# Altium PCB PCB1.PCBDOC
Units mm, origin at the board's own origin, x right, y up, seen from the top; angles counter-clockwise.
Board outline 180 x 160 mm, 2 copper layers (Top Layer, Bottom Layer); 118 components, 70 nets, 429 pads, 16 vias.
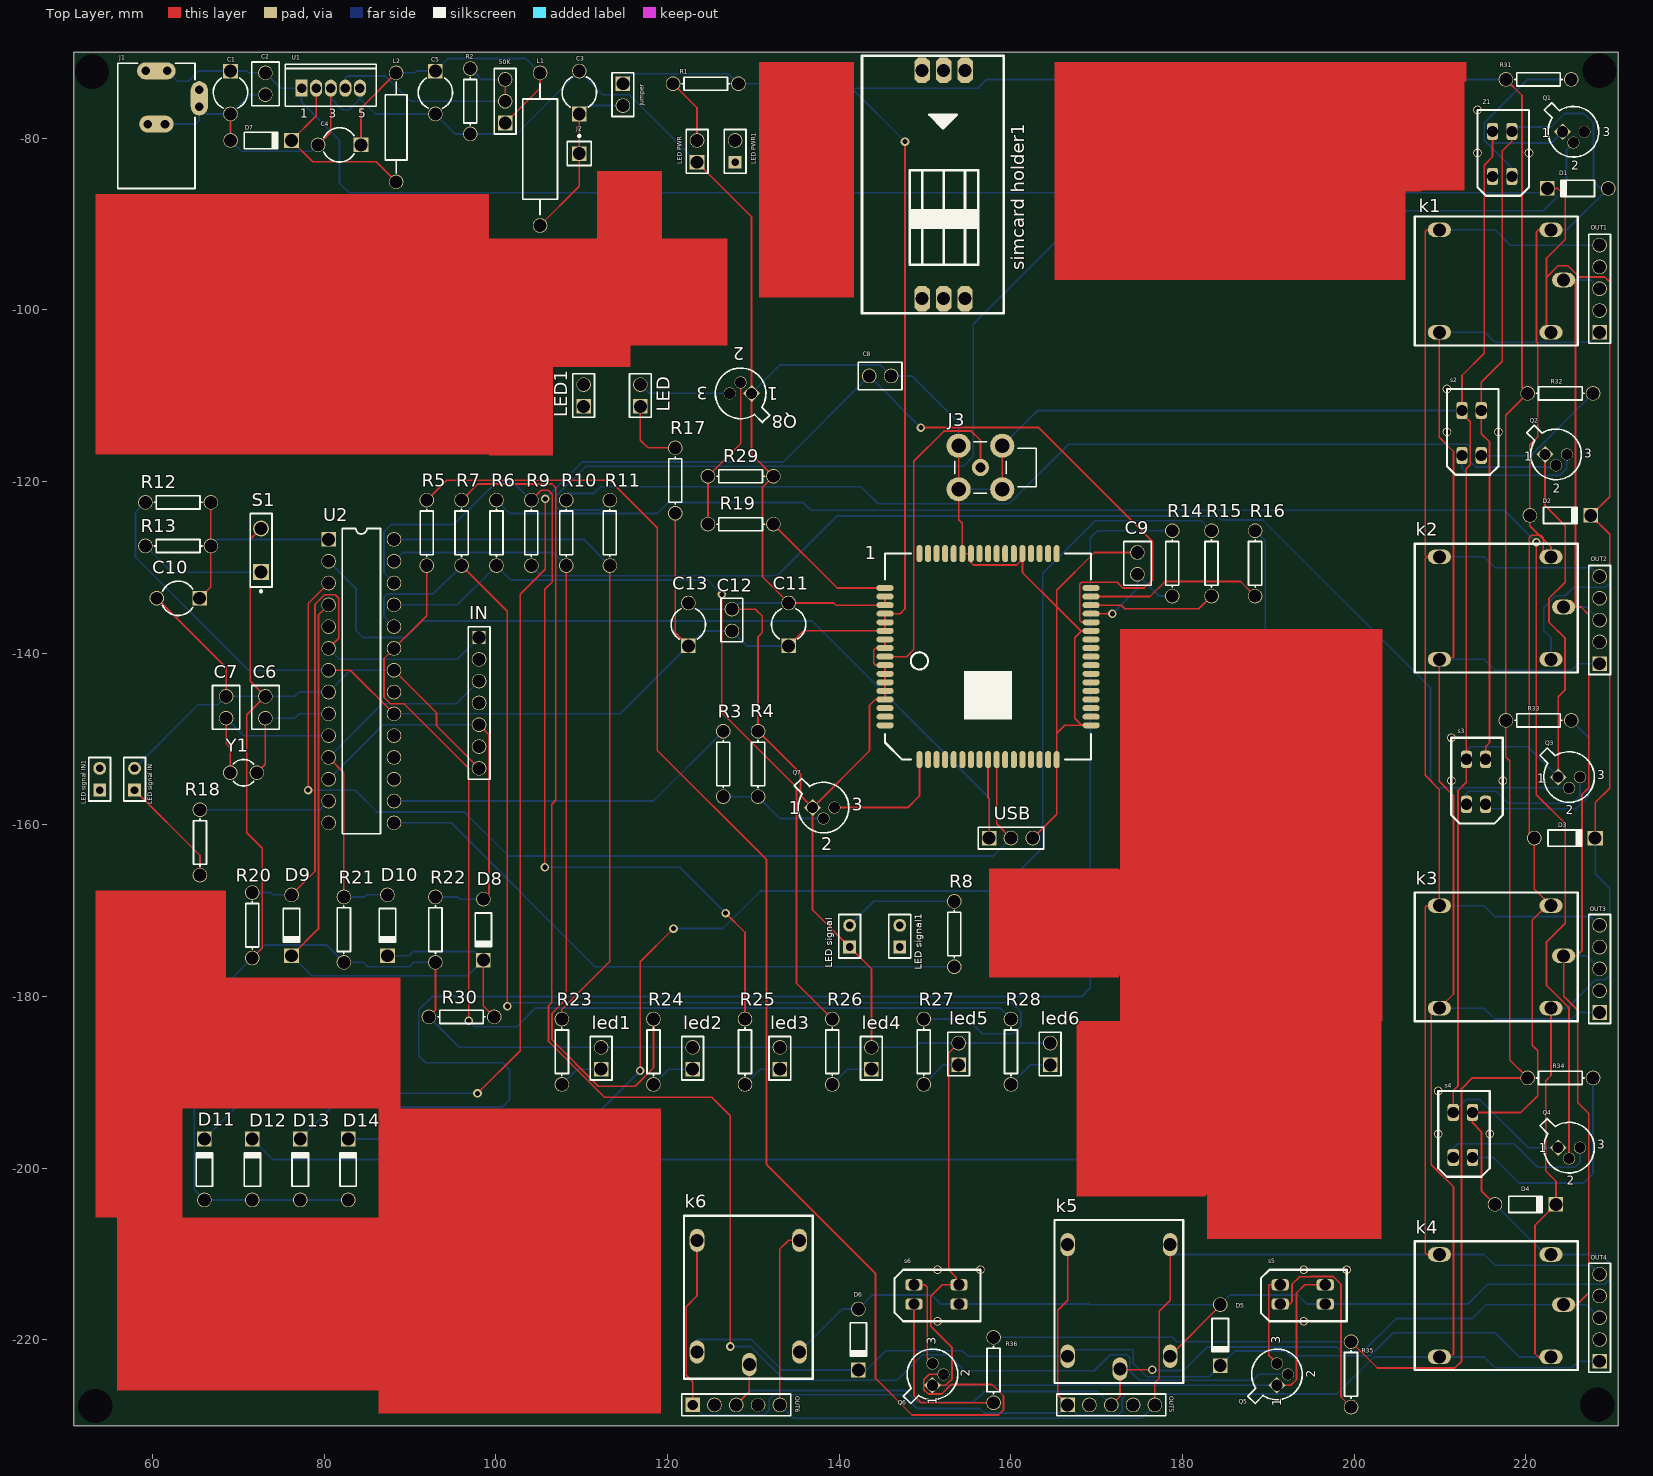
[diagram p0: Top Layer view]
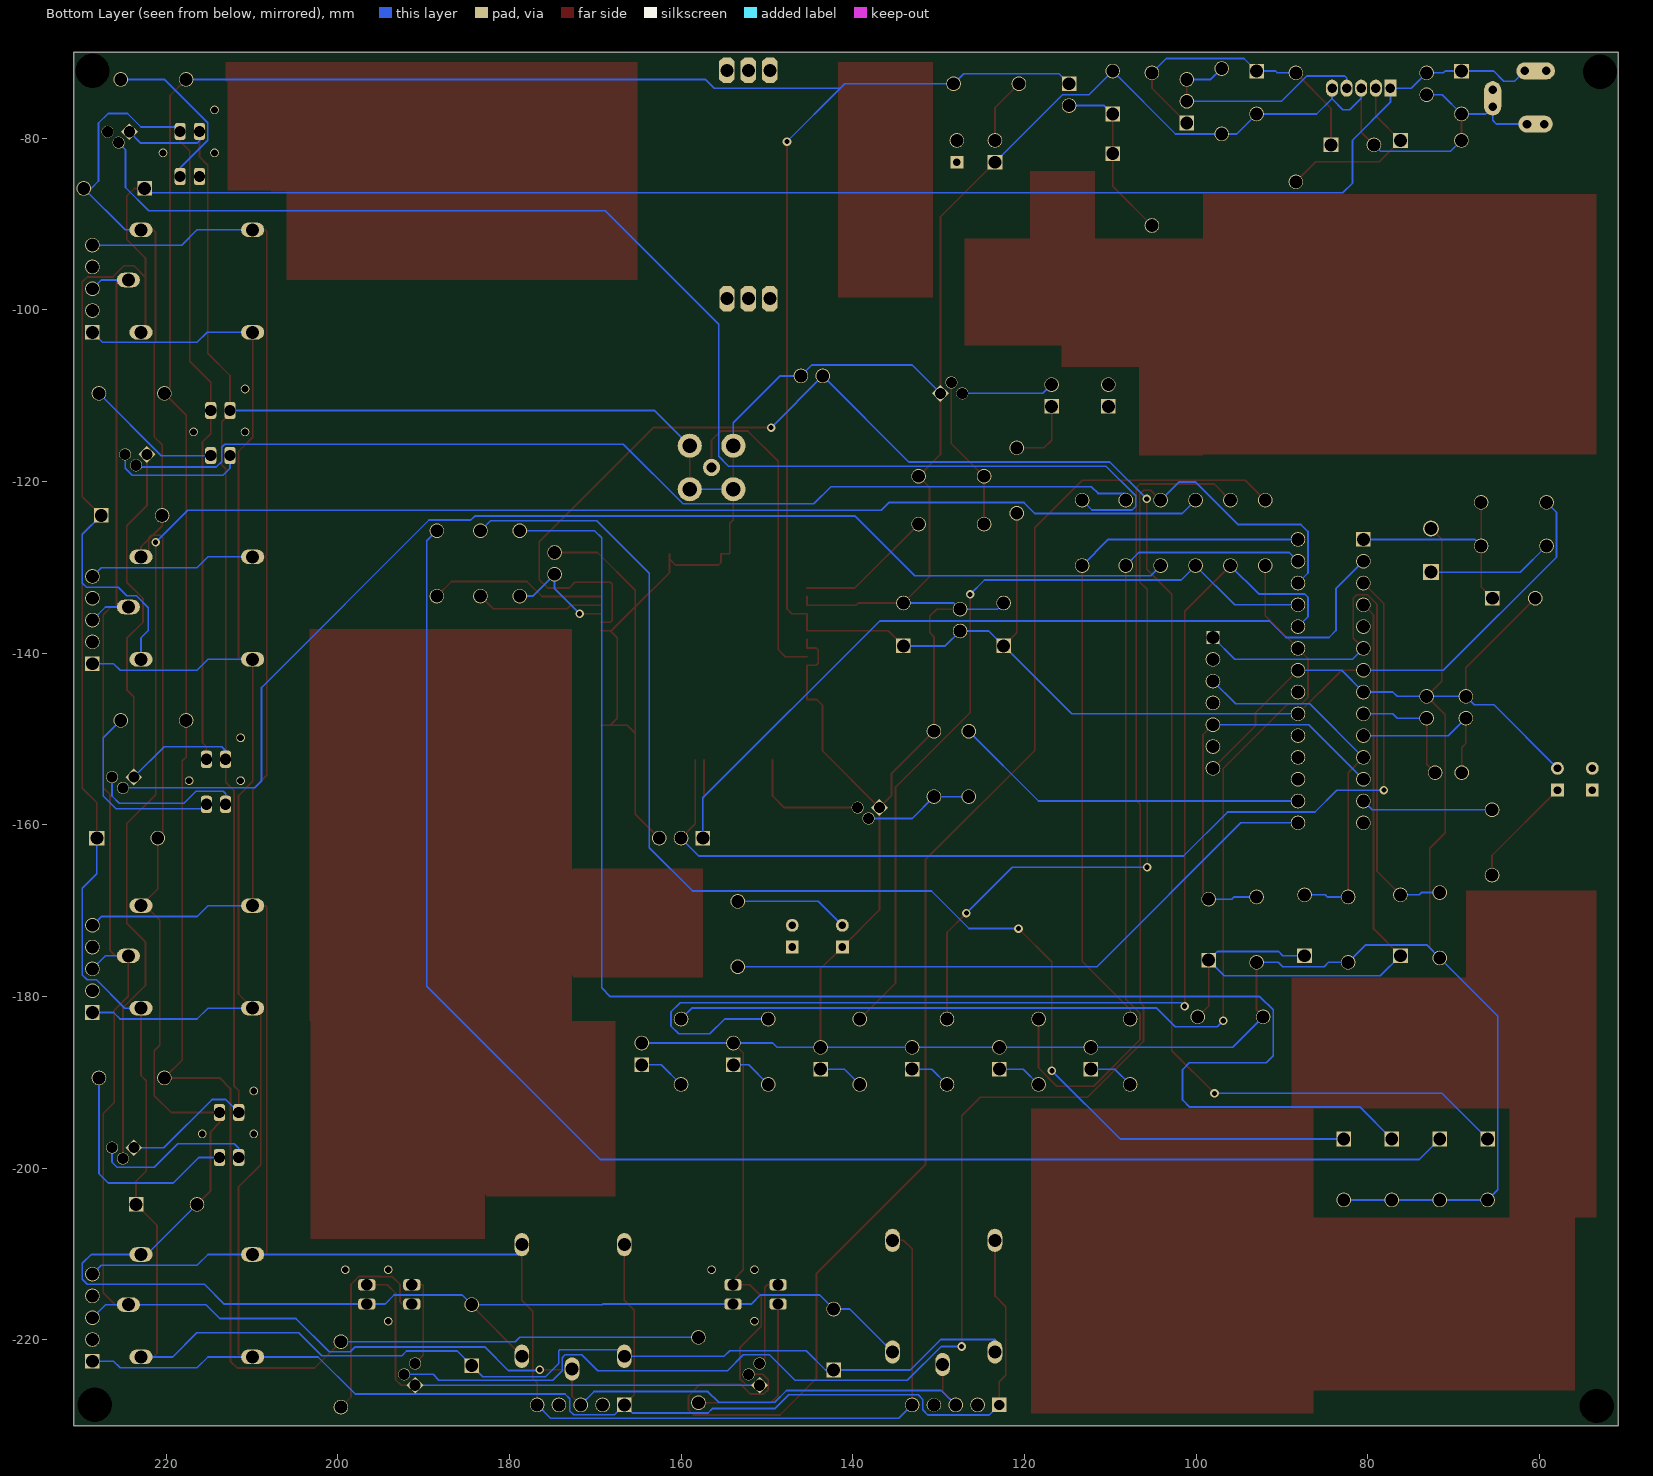
[diagram p1: Bottom Layer view, seen from below]

## Layer stack, top to bottom
Top Layer: signal copper 0.0356
Dielectric: dielectric 0.32, FR-4, Dk 4.8
Bottom Layer: signal copper 0.0356

## Board outline
50.8,-229.997 230.8,-229.997 230.8,-69.997 50.8,-69.997

## Design rules (kind name [scope] priority, off if disabled: settings)
Clearance [All] p1: gap=0.2
ComponentClearance [All] p1: gap=0.254 collisioncheckmode=3 verticalgap=0.254
PolygonConnect [All] p1: connectstyle=Relief reliefconductorwidth=0.254 reliefentries=4 polygonreliefangle="90 Angle"
RoutingVias [All] p1: holewidth=0.6 width=1 viastyle="Through Hole" minholewidth=0.711 minwidth=1.27 maxholewidth=0.711 maxwidth=1.27
SolderMaskExpansion [All] p1: expansion=0.102
TestPointUsage [All] p1: valid=0 allowmultiple=FALSE
Testpoint [All] p1: side=15 testpointundercomponent=TRUE minsize=1.016 maxsize=2.54 preferedsize=1.524 minholesize=0 maxholesize=1.016 preferedholesize=0.813 testpointgrid=0.025 style=1023 order=0123456789
Width [All] p1: maxlimit=0.2 minlimit=0.2 preferedwidth=0.2
18 further rules are at their usual default settings.

## Components (designator, comment, footprint, x,y, rotation, side; value= is the part's Value field where it differs from the comment)
1 "sim900" SIM900 149.352,-152.4 r90 top
50K "Header 3" HDR1X3 101.092,-78.232 r90 top
C1 "Cap2" CAPR5-4X5 69.088,-74.676 r270 top
C2 "Cap" VP32-3.2#1 73.152,-73.66 r90 top
C3 "Cap2" CAPR5-4X5 109.728,-74.676 r90 top
C4 "Cap2" CAPR5-4X5 81.788,-80.772 r180 top
C5 "Cap2" CAPR5-4X5 92.964,-74.676 r270 top
C6 "Cap" VP32-3.2#2 73.152,-146.304 r90 top
C7 "Cap" VP32-3.2#2 68.58,-146.304 r90 top
C8 "Cap" VP32-3.2#2 144.78,-107.696 r0 top
C9 "Cap" VP32-3.2#2 174.752,-129.54 r90 top
C10 "Cap2" CAPR5-4X5 62.992,-133.604 r180 top
C11 "Cap2" CAPR5-4X5 134.112,-136.652 r90 top
C12 "Cap" RAD-0.1 127.508,-136.144 r90 top
C13 "Cap2" CAPR5-4X5 122.428,-136.652 r90 top
D1 "Diode 1N4148" DO-35#1 226.06,-85.852 r180 top
D2 "Diode 1N4148" DO-35#1 224.028,-123.952 r0 top
D3 "Diode 1N4148" DO-35#2 224.536,-161.544 r0 top
D4 "Diode 1N4148" DO-35#1 219.964,-204.216 r0 top
D5 "Diode 1N4148" DO-35#1 184.404,-219.456 r270 top
D6 "Diode 1N4148" DO-35#1 142.24,-219.964 r270 top
D7 "Diode 1N5408" DO-35#1 72.644,-80.264 r0 top
D8 "Diode 1N4148" DO-35#1 98.552,-172.212 r270 top
D9 "Diode 1N4148" DO-35#1 76.2,-171.704 r270 top
D10 "Diode 1N4148" DO-35#1 87.376,-171.704 r270 top
D11 "D Zener4v7" DO-35#1 66.04,-200.152 r90 top
D12 "D Zener4v7" DO-35#1 71.628,-200.152 r90 top
D13 "D Zener4v7" DO-35#1 77.216,-200.152 r90 top
D14 "D Zener4v7" DO-35#1 82.804,-200.152 r90 top
IN "Header 7" HDR1X7 98.044,-138.176 r270 top
J1 "PWR2.5" KLD-0202 60.452,-85.852 r90 top
J2 "Socket" PIN1 109.728,-81.788 r0 top
J3 "COAX-F" MCX5.08-H5 156.464,-118.364 r180 top
jumper "Header 2" HDR1X2#1 114.808,-73.66 r270 top
k1 "Relay" Relays 226.06,-104.14 r90 top
k2 "Relay" Relays 226.06,-142.24 r90 top
k3 "Relay" Relays 226.06,-182.88 r90 top
k4 "Relay" Relays 226.06,-223.52 r90 top
k5 "Relay" Relays 165.1,-225.044 r0 top
k6 "Relay" Relays 121.92,-224.536 r0 top
L1 "Inductor Adj" AXIAL-0.7 105.156,-81.28 r270 top
L2 "Inductor Adj" AXIAL-0.5 88.392,-78.74 r90 top
LED "Header 2" HDR1X2#1 116.84,-111.252 r90 top
LED1 "Header 2" HDR1X2#1 110.236,-111.252 r90 top (schematic designator LED)
led1 "Header 2" HDR1X2#1 112.268,-188.468 r90 top
led2 "Header 2" HDR1X2#1 122.936,-188.468 r90 top
led3 "Header 2" HDR1X2#1 133.096,-188.468 r90 top
led4 "Header 2" HDR1X2#1 143.764,-188.468 r90 top
led5 "Header 2" HDR1X2#1 153.924,-187.96 r90 top
led6 "Header 2" HDR1X2#1 164.592,-187.96 r90 top
"LED PWR" "Header 2" HDR1X2#1 123.444,-82.804 r90 top
"LED PWR1" "Header 2" HDR1X2#2 127.889,-82.804 r90 top (schematic designator "LED PWR")
"LED signal" "Header 2" HDR1X2#3 141.224,-174.244 r90 top
"LED signal1" "Header 2" HDR1X2#3 147.066,-174.244 r90 top (schematic designator "LED signal")
"LED signal IN" "Header 2" HDR1X2#3 57.912,-155.956 r90 top
"LED signal IN1" "Header 2" HDR1X2#3 53.848,-155.956 r90 top (schematic designator "LED signal IN")
OUT1 "Header 5" HDR1X5#1 228.6,-102.616 r90 top
OUT2 "Header 5" HDR1X5#1 228.6,-141.224 r90 top
OUT3 "Header 5" HDR1X5#1 228.6,-181.864 r90 top
OUT4 "Header 5" HDR1X5#1 228.6,-222.504 r90 top
OUT5 "Header 5" HDR1X5#1 166.624,-227.584 r0 top
OUT6 "Header 5" HDR1X5#2 122.936,-227.584 r0 top
Q1 "2N2222" 22-03 225.552,-79.248 r0 top
Q2 "2N2222" 22-03 223.52,-116.84 r0 top
Q3 "2N2222" 22-03 225.044,-154.432 r0 top
Q4 "2N2222" 22-03 225.044,-197.612 r0 top
Q5 "2N2222" 22-03 191.008,-224.028 r90 top
Q6 "2N2222" 22-03 150.876,-224.028 r90 top
Q7 "2N2222" 22-03 138.176,-157.988 r0 top
Q8 "2N2222" 22-03 128.524,-109.728 r180 top
R1 "Res1" AXIAL-0.3 124.46,-73.66 r180 top
R2 "Res1" AXIAL-0.3 97.028,-75.692 r90 top
R3 "Res1" AXIAL-0.3 126.492,-152.908 r270 top
R4 "Res1" AXIAL-0.3 130.556,-152.908 r270 top
R5 "Res1" AXIAL-0.3 91.948,-125.984 r90 top
R6 "Res1" AXIAL-0.3 100.076,-125.984 r90 top
R7 "Res1" AXIAL-0.3 96.012,-125.984 r90 top
R8 "Res1" AXIAL-0.3 153.416,-172.72 r270 top
R9 "Res1" AXIAL-0.3 104.14,-125.984 r270 top
R10 "Res1" AXIAL-0.3 108.204,-125.984 r90 top
R11 "Res1" AXIAL-0.3 113.284,-125.984 r90 top
R12 "Res1" AXIAL-0.3 62.992,-122.428 r180 top
R13 "Res1" AXIAL-0.3 62.992,-127.508 r180 top
R14 "Res1" AXIAL-0.3 178.816,-129.54 r270 top
R15 "Res1" AXIAL-0.3 183.388,-129.54 r270 top
R16 "Res1" AXIAL-0.3 188.468,-129.54 r270 top
R17 "Res1" AXIAL-0.3 120.904,-119.888 r270 top
R18 "Res1" AXIAL-0.3 65.532,-162.052 r90 top
R19 "Res1" AXIAL-0.3 128.524,-124.968 r180 top
R20 "Res1" AXIAL-0.3 71.628,-171.704 r90 top
R21 "Res1" AXIAL-0.3 82.296,-172.212 r90 top
R22 "Res1" AXIAL-0.3 92.964,-172.212 r90 top
R23 "Res1" AXIAL-0.3 107.696,-186.436 r90 top
R24 "Res1" AXIAL-0.3 118.364,-186.436 r90 top
R25 "Res1" AXIAL-0.3 129.032,-186.436 r90 top
R26 "Res1" AXIAL-0.3 139.192,-186.436 r90 top
R27 "Res1" AXIAL-0.3 149.86,-186.436 r90 top
R28 "Res1" AXIAL-0.3 160.02,-186.436 r90 top
R29 "Res1" AXIAL-0.3 128.524,-119.38 r180 top
R30 "Res1" AXIAL-0.3 96.012,-182.372 r0 top
R31 "Res1" AXIAL-0.3 221.488,-73.152 r180 top
R32 "Res1" AXIAL-0.3 224.028,-109.728 r180 top
R33 "Res1" AXIAL-0.3 221.488,-147.828 r180 top
R34 "Res1" AXIAL-0.3 224.028,-189.484 r180 top
R35 "Res1" AXIAL-0.3 199.644,-224.028 r90 top
R36 "Res1" AXIAL-0.3 157.988,-223.52 r90 top
S1 "SW-PB" SPST-2 72.644,-128.016 r90 top
s2 "TCRT5000" TCRT5000 210.82,-109.22 r270 top
s3 "TCRT5000" TCRT5000 211.328,-149.86 r270 top
s4 "TCRT5000" TCRT5000 209.804,-191.008 r270 top
s5 "TCRT5000" TCRT5000 199.136,-211.836 r180 top
s6 "TCRT5000" TCRT5000 156.464,-211.836 r180 top
"simcard holder1" "simcard holder?" "Sim Card" 148.844,-86.868 r270 top
U1 "LM2576-ADJ" T05A 80.772,-74.168 r0 top
U2 "ATmega8-16PC" 28P3 84.328,-143.256 r270 top
USB "Header 3" HDR1X3 157.48,-161.544 r0 top
Y1 "XTAL" R38 70.612,-153.924 r270 top
Z1 "TCRT5000" TCRT5000 214.376,-76.708 r270 top

## Footprints (in the part's own frame and the unit in brackets; to place one, negate y for a bottom-side part, rotate by r counter-clockwise, add the part's x,y. Pads: shape width x height; smd on the part's side, far side on the other; paste and mask are expansions set on the pad)
22-03 [mm] "Can; 3 Leads; Pin Circle Dia. 2.54 mm; Lead Dia. 0.48 mm (max)"
  rect 1.4x1.4 hole 1.3 rot 45: 1(-1.27,0)
  round 1.4 hole 1.3: 2(0,-1.27) 3(1.27,0)
  silkscreen extent -3.39,-2.95 2.95,3.39
28P3 [mm] "DIP; 28 Leads; Row Spacing 7.62 mm; Pitch 2.54 mm"
  rect 1.7x1.7 hole 1.5: 1(-16.51,-3.81)
  round 1.7 hole 1.5: 2(-13.97,-3.81) 3(-11.43,-3.81) 4(-8.89,-3.81) 5(-6.35,-3.81) 6(-3.81,-3.81) 7(-1.27,-3.81) 8(1.27,-3.81) 9(3.81,-3.81) 10(6.35,-3.81) 11(8.89,-3.81) 12(11.43,-3.81) 13(13.97,-3.81) 14(16.51,-3.81) 15(16.51,3.81) 16(13.97,3.81) 17(11.43,3.81) 18(8.89,3.81) 19(6.35,3.81) 20(3.81,3.81) 21(1.27,3.81) 22(-1.27,3.81) 23(-3.81,3.81) 24(-6.35,3.81) 25(-8.89,3.81) 26(-11.43,3.81) 27(-13.97,3.81) 28(-16.51,3.81)
  silkscreen extent -17.78,-2.22 17.78,2.22
AXIAL-0.3 [mm] "Resistor; 2 Leads"
  round 1.7 hole 1.5: 1(-3.81,0) 2(3.81,0)
  silkscreen extent -2.77,-0.76 2.77,0.76
AXIAL-0.5 [mm] "Semiconductor Resistor; 2 Leads"
  round 1.7 hole 1.5: 1(-6.35,0) 2(6.35,0)
  silkscreen extent -5.33,-1.27 5.33,1.27
AXIAL-0.7 [mm] "Variable Resistor; 2 Leads"
  round 1.7 hole 1.5: 1(-8.89,0) 2(8.89,0)
  silkscreen extent -7.62,-2.03 7.62,2.03
CAPR5-4X5 [mm] "Capacitor; 2 Leads"
  rect 1.7x1.7 hole 1.5: 1(-2.5,0)
  round 1.7 hole 1.5: 2(2.5,0)
  silkscreen extent -1.69,-2 1.82,2
DO-35#1 [mm] "Diode, Axial; Body 3.8 x 1.9 mm (LxDia. max), Lead Dia. 0.53 mm (max)"
  round 1.7 hole 1.5: 1(-3.55,0)
  rect 1.7x1.7 hole 1.5: 2(3.55,0)
  silkscreen extent -1.95,-0.95 2.05,0.95
DO-35#2 [mm] "Diode, Axial; Body 3.8 x 1.9 mm (LxDia. max), Lead Dia. 0.53 mm (max)"
  round 1.7 hole 1.5: 1(-3.55,0)
  rect 1.77x1.7 hole 1.5: 2(3.55,0)
  silkscreen extent -1.95,-0.95 2.05,0.95
HDR1X2#1 [mm] "Connector; Header; 2 Position"
  rect 1.7x1.7 hole 1.5: 1(0,0)
  round 1.7 hole 1.5: 2(2.54,0)
  silkscreen extent -1.27,-1.27 3.81,1.27
HDR1X2#2 [mm] "Connector; Header; 2 Position"
  rect 1.5x1.5 hole 0.9: 1(0,0)
  round 1.7 hole 1.5: 2(2.54,0)
  silkscreen extent -1.27,-1.27 3.81,1.27
HDR1X2#3 [mm] "Connector; Header; 2 Position"
  rect 1.5x1.5 hole 0.9: 1(0,0)
  round 1.5 hole 0.9: 2(2.54,0)
  silkscreen extent -1.27,-1.27 3.81,1.27
HDR1X3 [mm] "Connector; Header; 3 Position"
  rect 1.7x1.7 hole 1.5: 1(0,0)
  round 1.7 hole 1.5: 2(2.54,0) 3(5.08,0)
  silkscreen extent -1.27,-1.27 6.35,1.27
HDR1X5#1 [mm] "Connector; Header; 5 Position"
  rect 1.7x1.7 hole 1.5: 1(0,0)
  round 1.7 hole 1.5: 2(2.54,0) 3(5.08,0) 4(7.62,0) 5(10.16,0)
  silkscreen extent -1.27,-1.27 11.43,1.27
HDR1X5#2 [mm] "Connector; Header; 5 Position"
  rect 1.7x1.7 hole 1.2: 1(0,0)
  round 1.7 hole 1.5: 2(2.54,0) 3(5.08,0) 5(10.16,0)
  oval 1.7x1.5 hole 1.5: 4(7.62,0)
  silkscreen extent -1.27,-1.27 11.43,1.27
HDR1X7 [mm] "Connector; Header; 7 Position"
  rect 1.5x1.5 hole 1.5: 1(0,0)
  round 1.7 hole 1.5: 2(2.54,0) 3(5.08,0) 4(7.62,0) 5(10.16,0) 6(12.7,0) 7(15.24,0)
  silkscreen extent -1.27,-1.27 16.51,1.27
KLD-0202 [mm] "DC Power Jack, 2.5mm, KLD Series, PCB Mount"
  oval 2x4.5 all layers, no hole: 1(13.7,0)
  round 1.5 hole 1: 1A(13.7,-1.25) 1B(13.7,1.25) 2A(7.5,-1) 2B(7.5,1) 3A(9.5,-5) 3B(11.5,-5)
  oval 2x4 all layers, no hole: 2(7.5,0)
  oval 4x2 all layers, no hole: 3(10.5,-5)
  silkscreen extent 0,-4.5 14.6,4.5
MCX5.08-H5 [mm] "Connector; RF Coaxial, MCX, Thru-Hole; 5 Position; Right-Angle"
  round 2 hole 1.2: 1(0,0)
  round 2.8 hole 1.7: 2(-2.54,-2.54) 3(2.54,-2.54) 4(2.54,2.54) 5(-2.54,2.54)
  silkscreen extent -6.5,-3 3,3
PIN1 [mm] "Connector; Plug"
  rect 1.7x1.7 hole 1.5: 1(0,0)
  silkscreen extent -1.4,-1.4 1.4,2.17
R38 [mm] "Crystal, Thru-Hole; 2 Leads; Body 3.1 x 8.2 mm (Dia.xH)"
  round 1.7 hole 1.5: 1(0,1.55) 2(0,-1.55)
  silkscreen extent -1.55,-1.19 1.55,1.17
RAD-0.1 [mm] "Indicating Instrument; 2 Leads"
  round 1.7 hole 1.5: 1(-1.27,0) 2(1.27,0)
  silkscreen extent -2.54,-1.27 2.54,1.27
Relays [mm]
  oval 1.7x2.7 hole 1.5: 1(7.62,1.651) 2(1.524,16.129) 3(13.462,16.129) 4(1.524,3.127) 5(13.462,3.127)
  silkscreen extent 0,0 15,19
SIM900 [mm]
  oval 2x0.7 smd: 1(0,0) 2(0,-1) 3(0,-2) 4(0,-3) 5(0,-4) 6(0,-5) 7(0,-6) 8(0,-7) 9(0,-8) 10(0,-9) 11(0,-10) 12(0,-11) 13(0,-12) 14(0,-13) 15(0,-14) 16(0,-15) 17(0,-16) 35(24,-16) 36(24,-15) 37(24,-14) 38(24,-13) 39(24,-12) 40(24,-11) 41(24,-10) 42(24,-9) 43(24,-8) 44(24,-7) 45(24,-6) 46(24,-5) 47(24,-4) 48(24,-3) 49(24,-2) 50(24,-1) 51(24,0)
  oval 0.7x2 smd: 18(4,-20) 19(5,-20) 20(6,-20) 21(7,-20) 22(8,-20) 23(9,-20) 24(10,-20) 25(11,-20) 26(12,-20) 27(13,-20) 28(14,-20) 29(15,-20) 30(16,-20) 31(17,-20) 32(18,-20) 33(19,-20) 34(20,-20) 52(20,4) 53(19,4) 54(18,4) 55(17,4) 56(16,4) 57(15,4) 58(14,4) 59(13,4) 60(12,4) 61(11,4) 62(10,4) 63(9,4) 64(8,4) 65(7,4) 66(6,4) 67(5,4) 68(4,4)
  silkscreen extent 0,-20 24,4
"Sim Card" [mm]
  oct 3x1.8 hole 1.5: ""(-14.776,0.824) ""(-14.776,3.324) ""(-14.776,5.824) ""(11.824,5.823) ""(11.824,0.822) ""(11.824,3.322)
  silkscreen extent -16.48,-6.18 13.52,10.32
SPST-2 [mm] "Circuit Breaker; 2 Leads"
  rect 1.85x1.85 hole 1.5: 1(-2.54,0)
  round 1.85 hole 1.5: 2(2.54,0)
  silkscreen extent -4.89,-1.27 4.28,1.27
T05A [mm] "TO, Thru-Hole, Vertical, Heatsink Mounted; 5 In-Line Leads; Pitch 1.70 mm"
  rect 1.4x2 hole 1.1: 1(-3.4,0)
  oval 1.4x2 hole 1.1: 2(-1.7,0) 3(0,0) 4(1.7,0) 5(3.4,0)
  silkscreen extent -5.3,-2.1 5.3,2.8
TCRT5000 [mm] "IR Sensor 2LEDs"
  round 1 hole 0.8: 0(0,0) 0(5,6) 0(5,0)
  rrect50% 2x1.3 hole 1.3: A(7.75,4) C(2.5,4) E(2.5,1.75) K(7.75,1.75)
  silkscreen extent 0,0 10,6
VP32-3.2#1 [mm] "Capacitor, Ceramic, Thru-Hole, Dipped Radial; Body 5.1 x 3.2 mm (WxT) Pin Spacing 2.54 mm (typ)"
  oval 1.7x1.65 hole 1.5: 1(-1.27,0)
  round 1.7 hole 1.5: 2(1.27,0)
  silkscreen extent -2.55,-1.6 2.55,1.6
VP32-3.2#2 [mm] "Capacitor, Ceramic, Thru-Hole, Dipped Radial; Body 5.1 x 3.2 mm (WxT) Pin Spacing 2.54 mm (typ)"
  round 1.7 hole 1.5: 1(-1.27,0) 2(1.27,0)
  silkscreen extent -2.55,-1.6 2.55,1.6

## Part data
50K USB: "Header, 3-Pin"
C1 C2 C3 C4 C5 C6 C7 C8 C9 C10 C11 C12 C13: "Capacitor"
D1 D2 D3 D4 D5 D6 D8 D9 D10: "High Conductance Fast Diode"
D7: "3 Amp Medium Power Silicon Rectifier Diode"
D11 D12 D13 D14: library part "D Zener", "Zener Diode"
IN: "Header, 7-Pin"
J1: "Low Voltage Power Supply Connector"
J3: "RF Coaxial PCB Connector, MCX; Thru-Hole, Right-Angle Mount Socket, Blunt Post Terminal, 50 Ohm Impedance"
jumper LED LED1 led1 led2 led3 led4 led5 led6 "LED PWR" "LED PWR1" "LED signal" "LED signal1" "LED signal IN" "LED signal IN1": "Header, 2-Pin"
k1 k2 k3 k4 k5 k6: "SPDT Relay"
L1 L2: "Adjustable Inductor"
OUT1 OUT2 OUT3 OUT4 OUT5 OUT6: "Header, 5-Pin"
Q1 Q2 Q3 Q4 Q5 Q6 Q7 Q8: "General Purpose Transistor NPN Silicon"
R1 R2 R3 R4 R5 R6 R7 R8 R9 R10 R11 R12 R13 R14 R15 R16 R17 R18 R19 R20 R21 R22 R23 R24 R25 R26 R27 R28 R29 R30 R31 R32 R33 R34 R35 R36: "Resistor"
S1: "Switch"
s2 s3 s4 s5 s6 Z1: "IR LED; T&R"
"simcard holder1": library part "simcard holder"
U1: library part LM2576HVT-5.0, "Simple Switcher 3A Step Down Voltage Regulator"
U2: "8-Bit AVR Microcontroller with 8K Bytes of In-System Programmable Flash Memory"
Y1: "Crystal Oscillator"

## Free pads (board coordinates)
  round 1.524 hole 4: 0(52.959,-72.263) 1(228.6,-72.136) 2(228.346,-227.584) 3(53.34,-227.711)

## Via types
v1: diameter 1, hole 0.6, Top Layer to Bottom Layer, 16 vias

## Nets (pads, with @x,y where several pads share a name; then routed paths per layer and width w, separated by ;. In a path a pad name is that pad's centre, name@x,y a point inside that pad or via, vN(x,y) a via of type N, cw(c..) or ccw(c..) an arc to the next point about the centre after c; other vN are vias at no path point)
12V: C1.1 C2.2 D1.2 D2.2 D3.2 D4.2 D5.2 D6.2 J1.1 J1.1A J1.1B k1.4 k2.4 k3.4 k4.4 k5.4 k6.4 U1.1 | length 473.7
  Top Layer w0.2: D1.2 223.698,-85.852 224.587,-86.741 224.587,-91.796 222.428,-93.955 222.428,-96.19 ; k4.4 221.488,-221.996 221.082,-221.59 221.082,-206.648 D4.2 223.514,-201.518 222.326,-200.33 222.326,-189.811 222.933,-189.205 k3.4 ; k1.4 222.428,-102.616 222.428,-96.19 ; D3.2 228.086,-157.404 229.768,-155.721 229.768,-126.142 D2.2 229.768,-121.762 229.768,-96.723 229.21,-96.164 226.212,-96.164 224.917,-94.869 223.749,-94.869 222.428,-96.19
  Bottom Layer w0.2: J1.1B J1.1 J1.1A 62.905,-73.355 64.16,-73.355 65.34,-72.176 C1.1 70.993,-72.176 71.207,-72.39 C2.2 74.93,-74.168 U1.1 77.372,-75.823 81.788,-80.239 81.788,-85.242 82.906,-86.36 221.793,-86.36 221.793,-85.852 D1.2 ; k6.4 123.444,-219.964 129.749,-219.964 133.299,-223.514 D6.2 143.186,-223.514 145.44,-221.259 154.356,-221.259 155.016,-221.92 166.624,-221.92 k5.4 166.624,-221.158 174.132,-221.158 174.27,-221.296 174.27,-222.759 175.808,-224.297 183.113,-224.297 D5.2 186.1,-221.31 191.999,-221.31 192.532,-221.844 201.879,-221.844 204.546,-219.177 216.433,-219.177 219.253,-221.996 k4.4 ; k3.4 224.815,-181.356 228.117,-178.054 229.21,-178.054 229.768,-177.495 229.768,-167.386 228.086,-165.704 D3.2 ; k2.4 222.936,-140.716 222.936,-138.201 222.098,-137.363 222.098,-134.696 223.469,-133.325 224.587,-133.325 225.577,-132.334 229.286,-132.334 229.768,-131.851 229.768,-126.142 D2.2
COM: k1.1 k2.1 k3.1 k4.1 k5.1 k6.1 OUT1.3 OUT2.3 OUT3.3 OUT4.3 OUT5.3 OUT6.3 | length 259.1
  Top Layer w0.2: OUT6.3 129.54,-226.06 k6.1 ; OUT5.3 172.72,-226.568 k5.1@172.72,-223.495 ; k5.1 k5.1@172.72,-223.495 ; v1(176.479,-223.495) k5.1@172.72,-223.495 ; k4.1 225.958,-215.9 227.33,-214.528 227.33,-193.624 226.06,-192.354 226.06,-181.61 224.409,-179.959 k3.1 225.958,-175.26 226.543,-174.676 226.543,-156.464 227.33,-155.677 227.33,-135.509 226.441,-134.62 225.806,-134.62 ; k2.1 225.806,-134.62 ; k1.1 225.806,-96.52 225.806,-134.62
  Bottom Layer w0.2: OUT6.3 129.692,-225.908 147.726,-225.908 149.098,-227.279 155.644,-227.279 156.889,-226.034 170.154,-226.034 OUT5.3 ; v1(176.479,-223.495) 176.555,-223.571 180.162,-223.571 182.905,-220.828 197.993,-220.828 198.552,-221.386 201.016,-221.386 204.876,-217.526 213.741,-217.526 215.367,-215.9 k4.1 227.076,-215.9 OUT4.3 ; k3.1 227.076,-175.26 OUT3.3 ; k2.1 227.076,-134.62 OUT2.3 ; k1.1 227.584,-96.52 OUT1.3
GND: 1.17 1.18 1.29 1.39 1.45 1.46 1.53 1.54 1.58 1.59 1.61 1.62 1.63 1.64 1.65 "LED PWR.1" "LED signal IN.2" "LED signal.1" C1.2 C2.1 C3.2 C4.2 C5.2 C6.2 C7.2 C8.2 C9.2 C10.2 C11.2 C12.2 C13.2 D7.1 D11.1 D12.1 D13.1 D14.1 IN.7 J1.2 J1.2A J1.2B J1.3 J1.3A J1.3B J3.2 J3.3 J3.4 J3.5 led1.2 led2.2 led3.2 led4.2 led5.2 led6.2 Q1.1 Q2.1 Q3.1 Q4.1 Q5.1 Q6.1 Q7.1 Q8.1 R2.1 R4.1 R20.1 R21.1 R22.1 R29.1 R30.1 S1.2 s2.E s3.E s4.E s5.E s6.E U1.3 U1.5 U2.8 U2.22 USB.3 Z1.E | length 1022.1
  Top Layer w0.2: C10.2 68.58,-141.692 C7.2 ; J1.3A J1.3 J1.3B ; C1.2 69.088,-78.734 69.094,-78.74 D7.1 ; R20.1 72.796,-174.346 72.796,-162.712 70.993,-160.909 70.993,-147.193 C6.2 71.399,-143.281 71.399,-126.721 S1.2 ; C4.2 80.772,-79.288 U1.3 ; U2.22 93.091,-146.939 93.091,-148.463 IN.7 ; R30.1 92.964,-181.61 R22.1 ; 123.444,-82.804 129.794,-89.154 Q8.1 129.794,-116.84 R29.1 131.064,-120.65 131.064,-131.104 C11.2 139.389,-134.152 139.637,-134.4 1.54 1.53 ; C12.2 130.247,-134.874 131.045,-135.672 131.045,-137.592 130.556,-138.081 R4.1 135.509,-154.051 135.509,-156.591 Q7.1 ; led4.2 143.764,-176.784 141.224,-174.244 136.906,-169.926 Q7.1 ; 1.58 1.59 144.272,-139.4 144.043,-139.629 144.043,-141.171 144.272,-141.4 1.61 1.62 1.63 1.64 1.65 144.211,-145.4 143.535,-146.075 143.535,-151.359 Q7.1 ; Q6.1 152.4,-225.298 153.162,-224.536 153.162,-220.913 150.664,-218.415 150.664,-214.916 151.994,-213.586 s6.E@153.619,-213.586 ; led5.2 152.756,-186.588 152.756,-211.836 153.619,-212.7 s6.E@153.619,-213.586 ; J3.3 J3.4 153.924,-124.438 154.352,-124.866 1.46 1.45 155.352,-129.419 155.651,-129.718 160.68,-129.718 1.39@161.352,-129.046 ; s6.E s6.E@153.619,-213.586 ; J3.5 J3.2 ; 1.39 1.39@161.352,-129.046 ; USB.3 165.352,-158.752 1.17 165.352,-149.327 ; 1.18 168.25,-148.4 ; C9.2 169.748,-128.27 165.352,-132.666 165.352,-134.607 ; Q5.1 192.634,-225.298 193.294,-224.638 193.294,-214.551 194.259,-213.586 s5.E ; s4.E 211.554,-190.96 212.115,-190.398 212.115,-156.007 213.078,-155.044 s3.E 213.078,-118.519 213.538,-118.059 213.538,-113.033 212.57,-112.065 s2.E 212.57,-107.648 215.163,-105.054 215.163,-83.134 216.126,-82.172 Z1.E ; Q2.1 222.25,-122.809 224.587,-125.146 224.587,-131.724 222.707,-133.604 222.707,-136.398 224.583,-138.274 224.583,-144.272 223.774,-145.081 Q3.1 ; 1.39@161.352,-129.046 161.352,-130.607 165.352,-134.607 ; 165.352,-149.327 166.279,-148.4 168.25,-148.4 ; 165.352,-149.327 165.352,-134.607 ; 165.352,-134.607 168.197,-137.452 ; 168.197,-137.452 1.29 168.25,-137.4 168.197,-137.452 ; 168.197,-137.452 167.437,-138.213 167.437,-147.587 168.25,-148.4
  Bottom Layer w0.2: 57.912,-153.416 65.303,-146.025 67.589,-146.025 C7.2 C6.2 76.581,-145.034 77.089,-144.526 U2.8 83.058,-141.986 U2.22 ; J1.2B J1.2 J1.2A 65.024,-78.352 65.452,-77.924 J1.3A ; J1.3 J1.3A ; D7.1 70.364,-81.534 78.526,-81.534 C4.2 ; C2.1 71.334,-74.93 C1.2 66.276,-77.176 J1.3A ; U1.3 80.772,-75.362 82.093,-76.683 82.906,-76.683 84.172,-75.416 ; D14.1 D13.1 D12.1 D11.1 64.872,-202.534 64.872,-182.27 R20.1 73.152,-173.99 80.264,-173.99 R21.1 84.582,-176.022 85.09,-176.53 89.916,-176.53 90.424,-176.022 R22.1 ; U1.5 84.172,-75.416 ; R30.1 95.758,-185.928 led1.2 led2.2 led3.2 led4.2 148.844,-185.928 149.352,-185.42 led5.2 led6.2 ; C13.2 123.15,-134.874 C12.2 128.23,-134.152 C11.2 ; 123.444,-82.804 115.57,-74.93 112.482,-74.93 C3.2 102.402,-79.502 R2.1 95.29,-79.502 C5.2 85.986,-77.176 84.172,-75.416 ; Q8.1 133.096,-106.426 144.78,-106.426 C8.2 148.463,-107.696 153.924,-113.157 J3.3 ; Q6.1 Q5.1 ; J3.4 J3.5 ; J3.2 163.093,-111.735 212.57,-111.735 s2.E ; s4.E 213.063,-191.999 214.655,-191.999 220.269,-197.612 Q4.1 ; s3.E 213.078,-151.359 213.535,-150.901 220.243,-150.901 Q3.1 ; Z1.E 216.126,-80.287 216.408,-80.569 222.961,-80.569 Q1.1
IN1: D9.1 IN.1 R20.2 U2.6 | length 68.5
  Top Layer w0.2: D9.1 78.93,-165.424 78.93,-134.303 80.035,-133.198 81.28,-133.198 81.686,-133.604 81.686,-138.278 U2.6
  Bottom Layer w0.2: R20.2 73.762,-167.894 74.022,-168.154 D9.1 ; U2.6 81.788,-140.716 95.504,-140.716 IN.1
IN2: D10.1 IN.3 R21.2 U2.11 | length 43.4
  Top Layer w0.2: U2.11 82.296,-153.924 R21.2
  Bottom Layer w0.2: U2.11 86.766,-145.898 95.402,-145.898 IN.3 ; R21.2 84.709,-168.402 84.957,-168.154 D10.1
IN3: D8.1 IN.5 R22.2 U2.12 | length 46.9
  Top Layer w0.2: IN.5 99.212,-149.504 99.212,-168.002 D8.1
  Bottom Layer w0.2: U2.12 86.868,-148.336 IN.5 ; R22.2 95.606,-168.402 95.866,-168.662 D8.1
IND2: D1.1 D2.1 D3.1 D4.1 D5.1 D6.1 k1.5 k2.5 k3.5 k4.5 k5.5 k6.5 s2.C s3.C s4.C s5.C s6.C Z1.C | length 364.1
  Top Layer w0.2: k5.5 178.562,-221.844 184.404,-216.002 D5.1 ; s4.C s4.C@213.804,-193.523 ; s3.C 215.328,-150.876 215.773,-150.431 215.773,-115.367 214.82,-114.414 s2.C 214.82,-108.433 217.272,-105.981 217.272,-81.483 218.376,-80.379 Z1.C ; D4.1 214.833,-202.635 214.833,-195.758 213.804,-194.729 s4.C@213.804,-193.523 ; k1.5 221.488,-90.678 221.259,-90.907 221.259,-103.759 221.386,-103.886 221.386,-114.808 220.478,-115.716 D2.1 220.478,-125.155 221.587,-126.263 ; s4.C@213.804,-193.523 219.431,-193.523 221.386,-191.567 221.386,-186.334 220.751,-185.699 220.751,-171.094 222.428,-169.418 k3.5 220.986,-167.471 D3.1 220.421,-161.544 220.421,-126.517 220.675,-126.263 221.587,-126.263 ; 221.587,-126.263 221.742,-126.263 222.047,-126.568 222.047,-126.723 ; 221.587,-126.263 222.047,-126.723 ; 222.047,-126.723 222.933,-127.61 k2.5 222.047,-128.778 222.047,-126.723
  Bottom Layer w0.2: k6.5 140.377,-216.414 D6.1 143.872,-214.782 150.788,-214.782 151.841,-215.836 s6.C 169.139,-215.836 169.209,-215.906 D5.1 185.528,-214.782 193.46,-214.782 194.513,-215.836 s5.C 213.221,-215.836 215.544,-213.512 229.21,-213.512 229.768,-212.954 229.768,-211.099 228.727,-210.058 k4.5 222.256,-210.058 D4.1 ; Z1.C 218.376,-78.689 222.936,-78.689 224.511,-77.114 226.771,-77.114 227.889,-78.232 227.889,-84.988 228.752,-85.852 D1.1 224.784,-90.678 k1.5
INT0: D8.2 D9.2 D10.2 R30.2 U2.4 | length 85.7
  Top Layer w0.2: D9.2 79.33,-172.124 79.33,-135.554 U2.4 ; D8.2 98.552,-181.102 R30.2
  Bottom Layer w0.2: D9.2 78.543,-177.597 96.717,-177.597 D8.2 97.542,-174.752 90.399,-174.752 89.897,-175.254 D10.2
"LED SIGNAL": R8.2 U2.15 | length 72.2
  Bottom Layer w0.2: U2.15 94.793,-159.766 111.557,-176.53 R8.2
NC: k1.2 k2.2 k3.2 k4.2 k5.2 k6.2 OUT1.1 OUT2.1 OUT3.1 OUT4.1 OUT5.1 OUT6.1 | length 338.6
  Top Layer w0.2: OUT6.1 122.936,-224.892 122.174,-224.13 122.174,-216.154 123.444,-214.884 k6.2 ; OUT5.1 165.456,-226.416 165.456,-216.56 166.624,-215.392 k5.2 ; k4.2 211.582,-221.742 211.582,-202.184 208.991,-199.593 208.991,-181.356 k3.2 211.582,-179.705 211.582,-156.591 209.931,-154.94 k2.2 211.582,-140.462 211.582,-116.51 209.931,-114.859 k1.2
  Bottom Layer w0.2: OUT6.1 124.104,-228.752 131.267,-228.752 131.851,-228.168 131.851,-226.949 132.385,-226.416 147.472,-226.416 149.047,-227.99 156.337,-227.99 156.87,-228.524 165.684,-228.524 OUT5.1 167.774,-228.734 172.535,-228.734 172.974,-228.295 172.974,-226.873 173.533,-226.314 197.993,-226.314 202.311,-221.996 k4.2 215.138,-221.996 216.408,-223.266 225.374,-223.266 226.136,-222.504 OUT4.1 ; k3.2 215.138,-181.356 216.408,-182.626 225.374,-182.626 226.136,-181.864 OUT3.1 ; k2.2 215.138,-140.716 216.408,-141.986 225.374,-141.986 226.136,-141.224 OUT2.1 ; k1.2 215.24,-102.616 216.408,-103.784 227.432,-103.784 OUT1.1
Net1_1: 1.1 Q7.3 | length 14.7
  Top Layer w0.2: Q7.3 148.006,-157.988 149.352,-156.642 1.1
Net1_31: 1.31 C9.1 R14.2 | length 13.4
  Top Layer w0.2: 1.31 v1(171.838,-135.4)
  Bottom Layer w0.2: v1(171.838,-135.4) 174.752,-132.486 C9.1 177.292,-133.35 R14.2
Net1_32: 1.32 R15.2 | length 14.8
  Top Layer w0.2: 1.32 172.856,-134.4 173.279,-134.823 181.915,-134.823 R15.2
Net1_33: 1.33 R16.2 | length 20.5
  Top Layer w0.2: 1.33 176.226,-133.4 177.978,-131.648 186.766,-131.648 R16.2
Net1_60: 1.60 J3.1 | length 38.5
  Top Layer w0.2: 1.60 147.865,-140.4 148.692,-139.573 148.692,-117.653 152.222,-114.122 155.397,-114.122 156.464,-115.189 J3.1
Net50K_1: 50K.1 C4.1 C5.1 L1.1 L2.2 | length 35.8
  Top Layer w0.2: C4.1 84.288,-76.494 L2.2 ; 50K.1 105.156,-74.168 L1.1
  Bottom Layer w0.2: L2.2 90.551,-72.39 90.765,-72.176 C5.1 94.426,-70.714 103.48,-70.714 L1.1
Net50K_2: 50K.2 50K.3 R2.2 U1.4 | length 28.3
  Top Layer w0.2: 50K.2 50K.3
  Bottom Layer w0.2: U1.4 82.472,-72.978 82.702,-72.747 87.122,-72.747 90.067,-75.692 50K.2 ; R2.2 98.298,-73.152 50K.3
NetC3_1: C3.1 J2.1 jumper.2 L1.2 | length 20.4
  Top Layer w0.2: L1.2 109.728,-85.598 J2.1 C3.1
  Bottom Layer w0.2: C3.1 110.704,-76.2 jumper.2
NetC6_1: C6.1 U2.9 Y1.1 | length 14.3
  Top Layer w0.2: Y1.1 73.152,-152.934 C6.1
  Bottom Layer w0.2: C6.1 76.581,-147.574 77.089,-147.066 U2.9
NetC7_1: C7.1 U2.10 Y1.2 | length 19.3
  Top Layer w0.2: C7.1 68.58,-150.521 69.062,-151.003 Y1.2
  Bottom Layer w0.2: C7.1 70.612,-149.606 U2.10
NetC10_1: C10.1 R12.1 R13.1 U2.1 | length 25.8
  Top Layer w0.2: C10.1 66.802,-132.294 R13.1 R12.1
  Bottom Layer w0.2: R13.1 67.564,-126.746 U2.1
NetD7_2: D7.2 L2.1 U1.2 | length 21.5
  Top Layer w0.2: U1.2 79.072,-77.386 D7.2 78.683,-82.753 86.055,-82.753 L2.1
Netled1_1: led1.1 R23.1 | length 5.3
  Bottom Layer w0.2: R23.1 109.474,-188.468 led1.1
Netled2_1: led2.1 R24.1 | length 5.3
  Bottom Layer w0.2: R24.1 120.142,-188.468 led2.1
Netled3_1: led3.1 R25.1 | length 4.8
  Bottom Layer w0.2: R25.1 130.81,-188.468 led3.1
Netled4_1: led4.1 R26.1 | length 5.3
  Bottom Layer w0.2: R26.1 140.97,-188.468 led4.1
Netled5_1: led5.1 R27.1 | length 5
  Bottom Layer w0.2: R27.1 152.146,-187.96 led5.1
Netled6_1: led6.1 R28.1 | length 5.5
  Bottom Layer w0.2: R28.1 162.306,-187.96 led6.1
"NetLED PWR_2": "LED PWR.2" R1.2 | length 7.8
  Top Layer w0.2: R1.2 123.444,-76.454 123.444,-80.264
"NetLED signal IN_1": "LED signal IN.1" R18.1 | length 13.1
  Top Layer w0.2: 57.912,-155.956 65.532,-163.576 R18.1
"NetLED signal_2": "LED signal.2" R8.1 | length 13.3
  Bottom Layer w0.2: 141.224,-171.704 144.018,-168.91 R8.1
NetLED_1: LED.1 R17.1 | length 8.4
  Top Layer w0.2: LED.1 116.84,-115.189 117.729,-116.078 R17.1
NetLED_2: LED.2 Q8.3 | length 10.8
  Bottom Layer w0.2: LED.2 117.856,-109.728 Q8.3
NETLIGHT: 1.52 R19.1 | length 16.1
  Top Layer w0.2: R19.1 139.766,-132.4 1.52
NetQ2_3: Q2.3 s2.K | length 16
  Bottom Layer w0.2: s2.K 212.57,-118.44 213.383,-119.253 223.977,-119.253 224.79,-118.44 Q2.3
NetQ3_3: Q3.3 s3.K | length 17.7
  Bottom Layer w0.2: s3.K 213.078,-156.365 213.36,-156.083 216.535,-156.083 217.932,-157.48 225.476,-157.48 226.314,-156.642 Q3.3
NetQ4_3: Q4.3 s4.K | length 19.1
  Bottom Layer w0.2: s4.K 211.554,-197.688 212.087,-197.155 218.643,-197.155 221.386,-199.898 225.73,-199.898 226.314,-199.314 Q4.3
NetQ5_3: Q5.3 s5.K | length 10.9
  Top Layer w0.2: Q5.3 190.068,-221.818 190.068,-213.586 s5.K
NetQ6_3: Q6.3 s6.K | length 10.8
  Top Layer w0.2: s6.K 149.962,-213.586 150.264,-213.888 150.264,-222.146 Q6.3
NetQ7_2: Q7.2 R3.2 R4.2 | length 12.7
  Bottom Layer w0.2: R3.2 R4.2 133.096,-159.258 Q7.2
NetQ8_2: Q8.2 R19.2 R29.2 | length 18.1
  Top Layer w0.2: R19.2 R29.2 128.524,-115.57 Q8.2
NetR13_2: R13.2 S1.1 | length 14.7
  Bottom Layer w0.2: R13.2 62.23,-130.556 S1.1
NetR18_2: R18.2 U2.13 | length 15.4
  Bottom Layer w0.2: R18.2 79.502,-158.242 U2.13
NetR31_1: R31.1 Z1.A | length 19.8
  Bottom Layer w0.2: Z1.A 218.376,-83.451 215.163,-80.239 215.163,-78.207 220.218,-73.152 R31.1
NetR32_1: R32.1 s2.A | length 16
  Bottom Layer w0.2: s2.A 214.82,-116.992 220.574,-116.992 R32.1
NetR33_1: R33.1 s3.A | length 22.8
  Bottom Layer w0.2: s3.A 215.328,-158.115 225.857,-158.115 227.33,-156.642 227.33,-149.86 R33.1
NetR34_1: R34.1 s4.A | length 26.9
  Bottom Layer w0.2: s4.A 213.804,-198.755 216.205,-198.755 219.177,-201.727 226.771,-201.727 227.838,-200.66 R34.1
NetR35_1: R35.1 s5.A | length 24.8
  Top Layer w0.2: s5.A 192.494,-215.836 192.761,-215.57 192.761,-213.538 193.65,-212.649 194.945,-212.649 194.97,-212.623 197.561,-212.623 198.476,-213.538 198.476,-226.67 R35.1
NetR36_1: R36.1 s6.A | length 20.3
  Top Layer w0.2: s6.A 148.714,-226.489 149.555,-227.33 R36.1
NO: k1.3 k2.3 k3.3 k4.3 k5.3 k6.3 OUT1.5 OUT2.5 OUT3.5 OUT4.5 OUT5.5 OUT6.5 | length 322.3
  Top Layer w0.2: OUT6.5 133.096,-209.423 134.112,-208.407 k6.3 ; OUT5.5 176.784,-225.019 177.292,-224.511 177.292,-216.662 178.562,-215.392 k5.3 ; k4.3 208.483,-210.058 208.28,-209.855 208.28,-169.621 208.483,-169.418 k3.3 209.931,-155.88 208.28,-154.229 208.28,-128.981 208.483,-128.778 ; k2.3 208.483,-128.778 ; k1.3 208.483,-90.678 208.28,-90.881 208.28,-128.575 208.483,-128.778
  Bottom Layer w0.2: OUT6.5 134.646,-229.134 175.234,-229.134 OUT5.5 ; k5.3 178.562,-210.058 k4.3 215.138,-210.058 216.408,-211.328 227.584,-211.328 OUT4.5 ; k3.3 215.138,-169.418 216.408,-170.688 227.584,-170.688 OUT3.5 ; k2.3 215.138,-128.778 216.408,-130.048 227.584,-130.048 OUT2.5 ; k1.3 216.408,-90.678 218.186,-92.456 OUT1.5
O1: Q1.2 R11.2 | length 155.3
  Bottom Layer w0.2: R11.2 112.134,-123.324 107.467,-123.324 107.054,-122.911 107.054,-121.666 110.508,-118.212 154.483,-118.212 155.626,-117.069 155.626,-101.676 168.859,-88.443 222.047,-88.443 224.739,-85.75 224.739,-81.331 Q1.2
O2: Q2.2 R10.2 | length 122.3
  Bottom Layer w0.2: R10.2 108.204,-121.387 111.43,-121.387 112.217,-120.599 142.545,-120.599 144.551,-122.606 159.791,-122.606 166.751,-115.646 213.182,-115.646 213.538,-116.002 213.538,-117.678 214.173,-118.313 223.317,-118.313 Q2.2
O3: Q3.2 R9.2 | length 143.7
  Bottom Layer w0.2: R9.2 105.308,-130.962 132.791,-130.962 139.725,-124.028 184.048,-124.028 184.506,-124.485 189.382,-124.485 208.89,-143.993 208.89,-154.864 209.702,-155.677 216.637,-155.677 Q3.2
O4: Q4.2 R6.2 | length 199.4
  Top Layer w0.2: v1(221.234,-127.076) 221.234,-156.489 224.587,-159.842 224.587,-171.475 222.428,-173.634 222.428,-178.714 225.044,-181.331 Q4.2
  Bottom Layer w0.2: R6.2 101.626,-123.724 118.795,-123.724 120.066,-122.453 135.814,-122.453 136.703,-123.342 217.5,-123.342 v1(221.234,-127.076)
O5: Q5.2 R7.2 | length 200.2
  Top Layer w0.2: R7.2 97.892,-120.294 106.539,-120.294 106.985,-120.74 106.985,-157.124 106.528,-157.582 106.528,-180.694 106.146,-181.076 106.146,-185.234 112.656,-191.745 125.171,-191.745 127.33,-193.904 v1(127.33,-220.777)
  Bottom Layer w0.2: v1(127.33,-220.777) 129.718,-220.777 133.655,-224.714 146.736,-224.714 149.708,-221.742 152.756,-221.742 154.61,-223.596 169.724,-223.596 171.577,-221.743 173.541,-221.743 173.87,-222.072 173.87,-223.609 174.958,-224.697 188.231,-224.697 188.9,-224.028 Q5.2
O6: Q6.2 R5.2 | length 172.5
  Top Layer w0.2: R5.2 94.285,-119.837 113.259,-119.837 118.796,-125.374 118.796,-151.333 131.547,-164.084 131.547,-199.593 144.247,-212.293 144.247,-224.511 148.488,-228.752 158.572,-228.752 159.156,-228.168 159.156,-226.543 157.81,-225.196 153.067,-225.196 151.95,-226.314 150.368,-226.314 149.86,-225.806 149.86,-224.663 150.495,-224.028 Q6.2
OL1: R11.1 R23.2 U2.28 | length 81.6
  Top Layer w0.2: R23.2 107.696,-181.508 113.284,-175.92 R11.1
  Bottom Layer w0.2: U2.28 110.236,-126.746 R11.1
OL2: R10.1 R24.2 U2.27 | length 97.7
  Top Layer w0.2: R10.1 108.204,-180.289 106.546,-181.947 106.546,-185.046 111.949,-190.449 116.23,-190.449 118.364,-188.316 R24.2
  Bottom Layer w0.2: U2.27 89.154,-128.27 106.68,-128.27 R10.1
OL3: R9.1 R25.2 U2.26 | length 110.4
  Top Layer w0.2: R9.1 105.308,-121.006 106.096,-121.006 106.578,-121.488 106.578,-131.699 105.715,-132.563 v1(105.715,-164.948) ; v1(126.771,-170.282) 129.032,-172.542 R25.2
  Bottom Layer w0.2: U2.26 86.97,-130.658 86.97,-125.832 87.782,-125.019 95.098,-125.019 100.051,-120.066 102.032,-120.066 R9.1 ; v1(105.715,-164.948) 121.437,-164.948 v1(126.771,-170.282)
OL4: R6.1 R26.2 U2.25 | length 96.3
  Top Layer w0.2: v1(126.34,-133.147) 126.34,-146.914 135.026,-155.6 135.026,-178.46 R26.2
  Bottom Layer w0.2: U2.25 95.504,-134.366 R6.1 101.752,-131.47 124.663,-131.47 v1(126.34,-133.147)
OL5: R7.1 R27.2 U2.24 | length 142.5
  Top Layer w0.2: R7.1 101.346,-135.128 v1(101.346,-181.127)
  Bottom Layer w0.2: U2.24 86.97,-135.738 86.97,-133.502 87.376,-133.096 92.71,-133.096 R7.1 ; v1(101.346,-181.127) 101.752,-180.721 160.122,-180.721 161.188,-181.788 161.188,-183.464 160.299,-184.353 156.667,-184.353 154.94,-182.626 R27.2
OL6: R5.1 R28.2 U2.23 | length 125
  Top Layer w0.2: R5.1 91.948,-135.636 U2.23 86.97,-140.614 86.97,-145.136 87.732,-145.898 89.306,-145.898 96.85,-153.441 v1(96.85,-182.829)
  Bottom Layer w0.2: v1(96.85,-182.829) 97.561,-183.54 102.438,-183.54 104.648,-181.331 158.725,-181.331 R28.2
PWRKEY: R3.1 U2.16 | length 41.7
  Bottom Layer w0.2: U2.16 118.364,-157.226 R3.1
RX: 1.10 U2.3 USB.2 | length 120.9
  Top Layer w0.2: v1(78.13,-155.956) 78.13,-134.214 U2.3 ; 1.10 158.352,-159.876 USB.2
  Bottom Layer w0.2: v1(78.13,-155.956) 83.617,-155.956 86.157,-158.496 96.342,-158.496 101.473,-163.627 157.937,-163.627 USB.2
SIM_CLK: D14.2 R15.1 | length 157.1
  Top Layer w0.2: v1(116.815,-188.646) 116.815,-175.971 v1(120.701,-172.085)
  Bottom Layer w0.2: D14.2 108.858,-196.602 v1(116.815,-188.646) ; v1(120.701,-172.085) 126.467,-172.085 130.835,-167.716 158.674,-167.716 163.728,-162.662 163.728,-130.683 169.85,-124.562 182.22,-124.562 R15.1
SIM_DATA: D13.2 R14.1 | length 188
  Bottom Layer w0.2: D13.2 80.956,-192.862 100.787,-192.862 101.6,-192.049 101.6,-188.519 100.787,-187.706 91.846,-187.706 91.034,-186.893 91.034,-181.559 92.583,-180.01 168.25,-180.01 169.266,-178.994 169.266,-126.568 170.104,-125.73 R14.1
SIM_RST: D12.2 R16.1 | length 180.9
  Bottom Layer w0.2: D12.2 74.01,-198.984 169.443,-198.984 189.636,-178.791 189.636,-126.898 R16.1
SIM_VDD: 1.30 C8.1 D11.2 | length 210.6
  Top Layer w0.2: v1(97.866,-191.287) 102.845,-186.309 102.845,-133.121 105.766,-130.2 v1(105.766,-122.022) ; v1(149.53,-113.716) 163.246,-113.716 176.53,-127 176.53,-131.445 175.565,-132.41 173.05,-132.41 172.39,-131.75 168.25,-131.75 168.046,-131.953 168.046,-136.197 168.25,-136.4 1.30
  Bottom Layer w0.2: D11.2 71.355,-191.287 v1(97.866,-191.287) ; v1(105.766,-122.022) 110.058,-117.729 133.477,-117.729 C8.1 v1(149.53,-113.716)
TX: 1.9 U2.2 USB.1 | length 106.7
  Top Layer w0.2: 1.9 157.352,-156.844 157.48,-156.972 USB.1
  Bottom Layer w0.2: U2.2 83.718,-132.486 83.718,-137.363 84.531,-138.176 89.535,-138.176 91.465,-136.246 136.881,-136.246 157.48,-156.845 USB.1
VCC: 1.55 1.56 1.57 C11.1 C12.1 C13.1 jumper.1 R1.1 R12.2 R17.2 R31.2 R32.2 R33.2 R34.2 R35.2 R36.2 U2.7 U2.20 | length 511.4
  Top Layer w0.2: U2.7 83.058,-141.986 U2.20 ; R17.2 120.904,-137.628 C13.1 ; C11.1 135.864,-137.4 1.57 1.56 1.55 147.117,-135.4 147.676,-134.841 v1(147.676,-80.391) ; R35.2 202.717,-223.291 211.709,-223.291 212.522,-222.479 212.522,-190.729 213.766,-189.484 R34.2 218.135,-187.401 218.135,-152.552 217.678,-152.095 R33.2 217.678,-112.268 R32.2 219.558,-109.068 219.558,-75.032 R31.2
  Bottom Layer w0.2: R12.2 58.014,-123.596 58.014,-128.803 71.196,-141.986 U2.7 ; U2.20 114.514,-147.066 C13.1 124.166,-137.414 C12.1 129.246,-139.152 C11.1 ; jumper.1 115.976,-72.492 127.102,-72.492 R1.1 140.945,-73.66 141.478,-74.193 ; v1(147.676,-80.391) 141.478,-74.193 ; R36.2 178.816,-219.71 179.324,-220.218 R35.2 ; R31.2 157.201,-73.152 156.159,-74.193 141.478,-74.193
pads on no net: 1.2 1.3 1.4 1.5 1.6 1.7 1.8 1.11 1.12 1.13 1.14 1.15 1.16 1.19 1.20 1.21 1.22 1.23 1.24 1.25 1.26 1.27 1.28 1.34 1.35 1.36 1.37 1.38 1.40 1.41 1.42 1.43 1.44 1.47 1.48 1.49 1.50 1.51 1.66 1.67 1.68 "LED PWR1.1" "LED PWR1.2" "LED signal1.1" "LED signal1.2" "LED signal IN1.1" "LED signal IN1.2" "simcard holder1." IN.2 IN.4 IN.6 LED1.1 LED1.2 OUT1.2 OUT1.4 OUT2.2 OUT2.4 OUT3.2 OUT3.4 OUT4.2 OUT4.4 OUT5.2 OUT5.4 OUT6.2 OUT6.4 Q1.3 s2.0 s3.0 s4.0 s5.0 s6.0 U2.5 U2.14 U2.17 U2.18 U2.19 U2.21 Z1.0 Z1.K
copper on no net: | length 0.2
  Top Layer w0.2: 110.109,-108.712 110.236,-108.585

## Other copper
Top Layer:
  rectangle: 182.753,-203.073 182.88,-182.88
  rectangle: 167.64,-203.327 182.753,-182.88
  rectangle: 182.88,-208.28 203.2,-182.88
  rectangle: 68.58,-193.04 88.9,-177.8
  rectangle: 53.34,-205.74 63.5,-193.04
  rectangle: 53.34,-193.04 68.58,-167.64
  rectangle: 55.88,-225.933 86.36,-205.74
  rectangle: 86.36,-228.6 119.253,-193.04
  rectangle: 172.593,-177.546 172.72,-165.227
  rectangle: 157.48,-177.8 172.593,-165.1
  rectangle: 172.72,-182.88 203.327,-137.16
  rectangle: 53.34,-116.84 56.007,-86.487
  rectangle: 99.187,-116.967 106.68,-106.68
  rectangle: 111.76,-91.694 119.38,-83.82
  rectangle: 115.697,-104.14 127,-91.694
  rectangle: 99.187,-106.68 115.697,-91.694
  rectangle: 56.007,-116.84 99.187,-86.487
  rectangle: 205.74,-73.406 213.106,-71.12
  rectangle: 205.994,-86.233 207.772,-73.406
  rectangle: 207.772,-86.106 212.852,-73.279
  rectangle: 165.1,-96.52 205.994,-71.12
  rectangle: 130.683,-98.552 141.732,-71.12

## Silkscreen, mask and mechanical layers (free items; w line width, h text height)
Drill Drawing:
  text ".LEGEND" at 235.88,-224.917 h1.52
  text "Drill Drawing." at 235.88,-227.457 h1.52

## Text inside footprints (layer, text, board x,y; h text height)
J1: Mechanical 1 "Mech 2 - Clearance, move to internal plane if present" at 55.386,-85.566 h0.3 r90; Mechanical 1 "Mech 1 - Slot cut-out" at 54.886,-85.566 h0.3 r90; Mechanical 1 "Assign keep-out area to slot" at 53.886,-85.566 h0.3 r90; Mechanical 1 "Alert PCB fab to slot details" at 54.386,-85.566 h0.3 r90
Q1: Top Overlay "1" at 221.869,-79.883 h1; Top Overlay "2" at 225.298,-83.693 h1; Top Overlay "3" at 228.981,-79.756 h1
Q2: Top Overlay "1" at 219.837,-117.602 h1; Top Overlay "2" at 223.139,-121.285 h1; Top Overlay "3" at 226.822,-117.221 h1
Q3: Top Overlay "1" at 221.361,-155.067 h1; Top Overlay "2" at 224.663,-158.75 h1; Top Overlay "3" at 228.346,-154.686 h1
Q4: Top Overlay "1" at 221.488,-198.12 h1; Top Overlay "2" at 224.79,-201.93 h1; Top Overlay "3" at 228.346,-197.739 h1
Q5: Top Overlay "1" at 191.516,-227.711 h1 r90; Top Overlay "2" at 195.453,-224.409 h1 r90; Top Overlay "3" at 191.389,-220.472 h1 r90
Q6: Top Overlay "1" at 151.384,-227.584 h1 r90; Top Overlay "2" at 155.194,-224.282 h1 r90; Top Overlay "3" at 151.257,-220.599 h1 r90
Q7: Top Overlay "1" at 134.112,-158.75 h1.5; Top Overlay "2" at 137.922,-162.941 h1.5; Top Overlay "3" at 141.478,-158.369 h1.5
Q8: Top Overlay "1" at 132.904,-109.009 h1.5 r180; Top Overlay "2" at 128.967,-104.373 h1.5 r180; Top Overlay "3" at 124.712,-108.986 h1.5 r180
U1: Top Overlay "1" at 77.216,-77.597 h1; Top Overlay "3" at 80.518,-77.597 h1; Top Overlay "5" at 83.947,-77.597 h1